# Altium PCB RGBM.PcbDoc (part 2 of 3)
Units mil, origin at the board's own origin, x right, y up, seen from the top; angles counter-clockwise.
Board outline 10650 x 5000 mil, 2 copper layers (Top Layer, Bottom Layer); 598 components, 309 nets, 1806 pads, 0 vias.
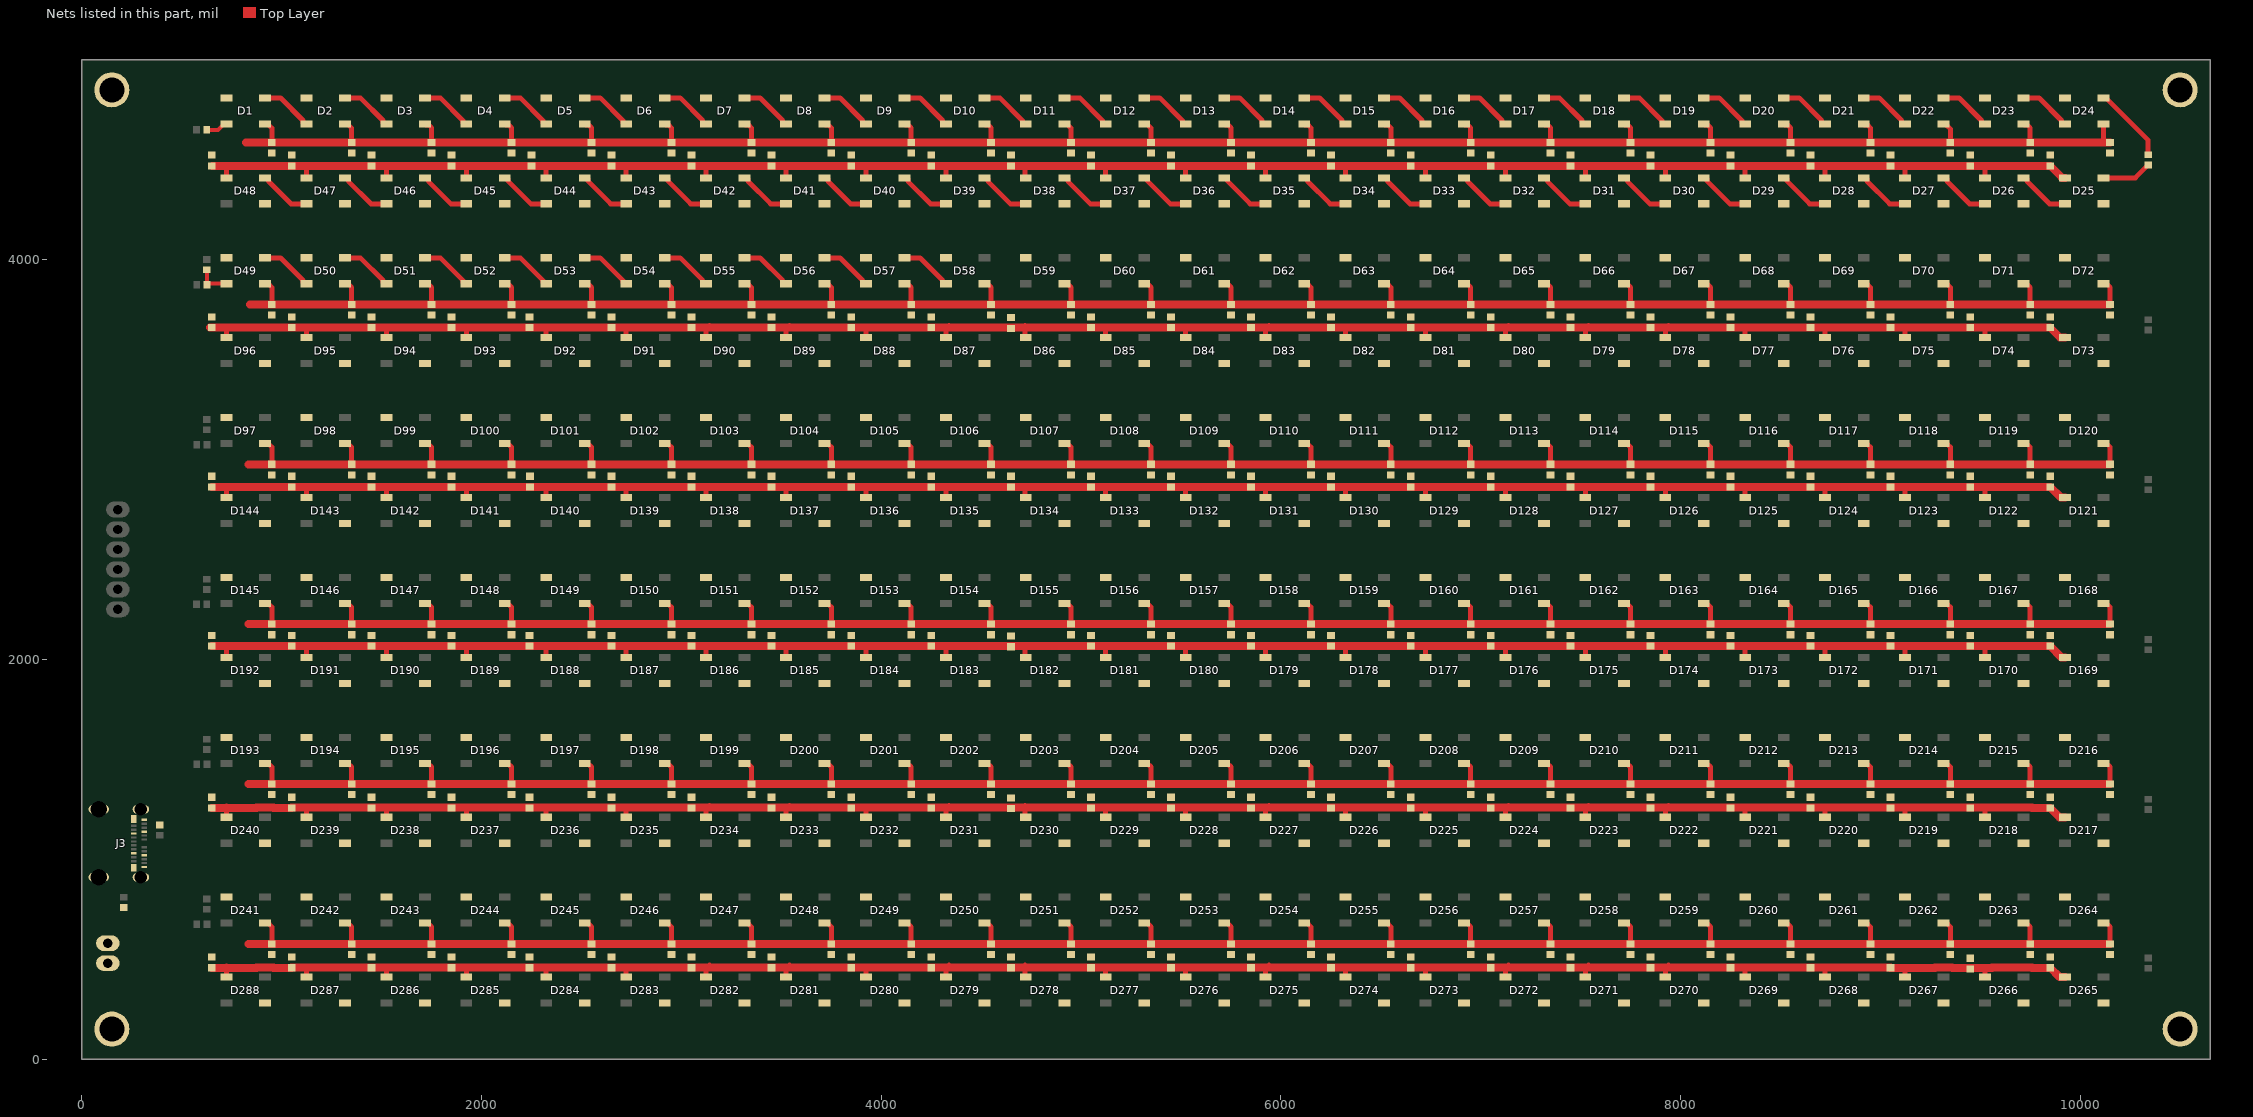
[diagram p2: the nets of this part, all layers, seen from the top]

## Nets (pads, with @x,y where several pads share a name; then routed paths per layer and width w, separated by ;. In a path a pad name is that pad's centre, name@x,y a point inside that pad or via, vN(x,y) a via of type N, cw(c..) or ccw(c..) an arc to the next point about the centre after c; other vN are vias at no path point)
+5V: C1.2 C2.2 C3.2 C4.2 C5.2 C6.2 C7.2 C8.2 C9.2 C10.2 C11.2 C12.2 C13.2 C14.2 C15.2 C16.2 C17.2 C18.2 C19.2 C20.2 C21.2 C22.2 C23.2 C24.2 C25.2 C26.2 C27.2 C28.2 C29.2 C30.2 C31.2 C32.2 C33.2 C34.2 C35.2 C36.2 C37.2 C38.2 C39.2 C40.2 C41.2 C42.2 C43.2 C44.2 C45.2 C46.2 C47.2 C48.2 C49.2 C50.2 C51.2 C52.2 C53.2 C54.2 C55.2 C56.2 C57.2 C58.2 C59.2 C60.2 C61.2 C62.2 C63.2 C64.2 C65.2 C66.2 C67.2 C68.2 C69.2 C70.2 C71.2 C72.2 C73.2 C74.2 C75.2 C76.2 C77.2 C78.2 C79.2 C80.2 C81.2 C82.2 C83.2 C84.2 C85.2 C86.2 C87.2 C88.2 C89.2 C90.2 C91.2 C92.2 C93.2 C94.2 C95.2 C96.2 C97.2 C98.2 C99.2 C100.2 C101.2 C102.2 C103.2 C104.2 C105.2 C106.2 C107.2 C108.2 C109.2 C110.2 C111.2 C112.2 C113.2 C114.2 C115.2 C116.2 C117.2 C118.2 C119.2 C120.2 C121.2 C122.2 C123.2 C124.2 C125.2 C126.2 C127.2 C128.2 C129.2 C130.2 C131.2 C132.2 C133.2 C134.2 C135.2 C136.2 C137.2 C138.2 C139.2 C140.2 C141.2 C142.2 C143.2 C144.2 C145.2 C146.2 C147.2 C148.2 C149.2 C150.2 C151.2 C152.2 C153.2 C154.2 C155.2 C156.2 C157.2 C158.2 C159.2 C160.2 C161.2 C162.2 C163.2 C164.2 C165.2 C166.2 C167.2 C168.2 C169.2 C170.2 C171.2 C172.2 C173.2 C174.2 C175.2 C176.2 C177.2 C178.2 C179.2 C180.2 C181.2 C182.2 C183.2 C184.2 C185.2 C186.2 C187.2 C188.2 C189.2 C190.2 C191.2 C192.2 C193.2 C194.2 C195.2 C196.2 C197.2 C198.2 C199.2 C200.2 C201.2 C202.2 C203.2 C204.2 C205.2 C206.2 C207.2 C208.2 C209.2 C210.2 C211.2 C212.2 C213.2 C214.2 C215.2 C216.2 C217.2 C218.2 C219.2 C220.2 C221.2 C222.2 C223.2 C224.2 C225.2 C226.2 C227.2 C228.2 C229.2 C230.2 C231.2 C232.2 C233.2 C234.2 C235.2 C236.2 C237.2 C238.2 C239.2 C240.2 C241.2 C242.2 C243.2 C244.2 C245.2 C246.2 C247.2 C248.2 C249.2 C250.2 C251.2 C252.2 C253.2 C254.2 C255.2 C256.2 C257.2 C258.2 C259.2 C260.2 C261.2 C262.2 C263.2 C264.2 C265.2 C266.2 C267.2 C268.2 C269.2 C270.2 C271.2 C272.2 C273.2 C274.2 C275.2 C276.2 C277.2 C278.2 C279.2 C280.2 C281.2 C282.2 C283.2 C284.2 C285.2 C286.2 C287.2 C288.2 D1.1-VDD D2.1-VDD D3.1-VDD D4.1-VDD D5.1-VDD D6.1-VDD D7.1-VDD D8.1-VDD D9.1-VDD D10.1-VDD D11.1-VDD D12.1-VDD D13.1-VDD D14.1-VDD D15.1-VDD D16.1-VDD D17.1-VDD D18.1-VDD D19.1-VDD D20.1-VDD D21.1-VDD D22.1-VDD D23.1-VDD D24.1-VDD D25.1-VDD D26.1-VDD D27.1-VDD D28.1-VDD D29.1-VDD D30.1-VDD D31.1-VDD D32.1-VDD D33.1-VDD D34.1-VDD D35.1-VDD D36.1-VDD D37.1-VDD D38.1-VDD D39.1-VDD D40.1-VDD D41.1-VDD D42.1-VDD D43.1-VDD D44.1-VDD D45.1-VDD D46.1-VDD D47.1-VDD D48.1-VDD D49.1-VDD D50.1-VDD D51.1-VDD D52.1-VDD D53.1-VDD D54.1-VDD D55.1-VDD D56.1-VDD D57.1-VDD D58.1-VDD D59.1-VDD D60.1-VDD D61.1-VDD D62.1-VDD D63.1-VDD D64.1-VDD D65.1-VDD D66.1-VDD D67.1-VDD D68.1-VDD D69.1-VDD D70.1-VDD D71.1-VDD D72.1-VDD D73.1-VDD D74.1-VDD D75.1-VDD D76.1-VDD D77.1-VDD D78.1-VDD D79.1-VDD D80.1-VDD D81.1-VDD D82.1-VDD D83.1-VDD D84.1-VDD D85.1-VDD D86.1-VDD D87.1-VDD D88.1-VDD D89.1-VDD D90.1-VDD D91.1-VDD D92.1-VDD D93.1-VDD D94.1-VDD D95.1-VDD D96.1-VDD D97.1-VDD D98.1-VDD D99.1-VDD D100.1-VDD D101.1-VDD D102.1-VDD D103.1-VDD D104.1-VDD D105.1-VDD D106.1-VDD D107.1-VDD D108.1-VDD D109.1-VDD D110.1-VDD D111.1-VDD D112.1-VDD D113.1-VDD D114.1-VDD D115.1-VDD D116.1-VDD D117.1-VDD D118.1-VDD D119.1-VDD D120.1-VDD D121.1-VDD D122.1-VDD D123.1-VDD D124.1-VDD D125.1-VDD D126.1-VDD D127.1-VDD D128.1-VDD D129.1-VDD D130.1-VDD D131.1-VDD D132.1-VDD D133.1-VDD D134.1-VDD D135.1-VDD D136.1-VDD D137.1-VDD D138.1-VDD D139.1-VDD D140.1-VDD D141.1-VDD D142.1-VDD D143.1-VDD D144.1-VDD D145.1-VDD D146.1-VDD D147.1-VDD D148.1-VDD D149.1-VDD D150.1-VDD D151.1-VDD D152.1-VDD D153.1-VDD D154.1-VDD D155.1-VDD D156.1-VDD D157.1-VDD D158.1-VDD D159.1-VDD D160.1-VDD D161.1-VDD D162.1-VDD D163.1-VDD D164.1-VDD D165.1-VDD D166.1-VDD D167.1-VDD D168.1-VDD D169.1-VDD D170.1-VDD D171.1-VDD D172.1-VDD D173.1-VDD D174.1-VDD D175.1-VDD D176.1-VDD D177.1-VDD D178.1-VDD D179.1-VDD D180.1-VDD D181.1-VDD D182.1-VDD D183.1-VDD D184.1-VDD D185.1-VDD D186.1-VDD D187.1-VDD D188.1-VDD D189.1-VDD D190.1-VDD D191.1-VDD D192.1-VDD D193.1-VDD D194.1-VDD D195.1-VDD D196.1-VDD D197.1-VDD D198.1-VDD D199.1-VDD D200.1-VDD D201.1-VDD D202.1-VDD D203.1-VDD D204.1-VDD D205.1-VDD D206.1-VDD D207.1-VDD D208.1-VDD D209.1-VDD D210.1-VDD D211.1-VDD D212.1-VDD D213.1-VDD D214.1-VDD D215.1-VDD D216.1-VDD D217.1-VDD D218.1-VDD D219.1-VDD D220.1-VDD D221.1-VDD D222.1-VDD D223.1-VDD D224.1-VDD D225.1-VDD D226.1-VDD D227.1-VDD D228.1-VDD D229.1-VDD D230.1-VDD D231.1-VDD D232.1-VDD D233.1-VDD D234.1-VDD D235.1-VDD D236.1-VDD D237.1-VDD D238.1-VDD D239.1-VDD D240.1-VDD D241.1-VDD D242.1-VDD D243.1-VDD D244.1-VDD D245.1-VDD D246.1-VDD D247.1-VDD D248.1-VDD D249.1-VDD D250.1-VDD D251.1-VDD D252.1-VDD D253.1-VDD D254.1-VDD D255.1-VDD D256.1-VDD D257.1-VDD D258.1-VDD D259.1-VDD D260.1-VDD D261.1-VDD D262.1-VDD D263.1-VDD D264.1-VDD D265.1-VDD D266.1-VDD D267.1-VDD D268.1-VDD D269.1-VDD D270.1-VDD D271.1-VDD D272.1-VDD D273.1-VDD D274.1-VDD D275.1-VDD D276.1-VDD D277.1-VDD D278.1-VDD D279.1-VDD D280.1-VDD D281.1-VDD D282.1-VDD D283.1-VDD D284.1-VDD D285.1-VDD D286.1-VDD D287.1-VDD D288.1-VDD J2.1 J3.A4 J3.A9 J3.B4 J3.B9 | length 136269.4
  Top Layer w25: 720,4470 723.54,4466.46 D48.1-VDD@723.54,4409.96 ; D288.1-VDD@723.54,409.96 723.54,456.85 723.54,466.46 ; D240.1-VDD@723.54,1209.96 723.54,1256.85 723.54,1266.46 ; D192.1-VDD@723.54,2009.96 723.54,2066.46 ; D144.1-VDD@723.54,2809.96 723.54,2863.43 723.54,2866.46 ; D96.1-VDD@723.54,3609.96 723.54,3660 723.54,3666.46 ; D241.1-VDD@916.46,683.46 928.27,683.46 950,661.73 C241.2@950,590 ; D193.1-VDD@916.46,1483.46 928.27,1483.46 950,1461.73 C193.2@950,1390 ; D145.1-VDD@916.46,2283.46 928.27,2283.46 950,2261.73 C145.2@950,2190 ; D97.1-VDD@916.46,3083.46 928.27,3083.46 950,3061.73 C97.2@950,2990 ; D49.1-VDD@916.46,3883.46 928.27,3883.46 950,3861.73 C49.2@950,3790 ; D1.1-VDD@916.46,4680.04 928.27,4680.04 950,4658.31 C1.2@950,4586.57 ; D287.1-VDD@1123.54,409.96 1123.54,457.68 1123.54,463.54 ; D239.1-VDD@1123.54,1209.96 1123.54,1257.68 1123.54,1263.54 ; D191.1-VDD@1123.54,2009.96 1123.54,2063.54 ; D143.1-VDD@1123.54,2809.96 1123.54,2863.43 1123.54,2863.54 ; D95.1-VDD@1123.54,3609.96 1123.54,3660 1123.54,3663.54 ; D47.1-VDD@1123.54,4409.96 1123.54,4463.54 1130,4470 ; D242.1-VDD@1316.46,683.46 1328.27,683.46 1350,661.73 C242.2@1350,590 ; D194.1-VDD@1316.46,1483.46 1328.27,1483.46 1350,1461.73 C194.2@1350,1390 ; D146.1-VDD@1316.46,2283.46 1328.27,2283.46 1350,2261.73 C146.2@1350,2190 ; D98.1-VDD@1316.46,3083.46 1328.27,3083.46 1350,3061.73 C98.2@1350,2990 ; D50.1-VDD@1316.46,3883.46 1328.27,3883.46 1350,3861.73 C50.2@1350,3790 ; D2.1-VDD@1316.46,4680.04 1328.27,4680.04 1333.48,4674.82 1350,4658.31 C2.2@1350,4586.57 ; 1320,4580 1320,4586.57 ; 1520,4470 1523.54,4466.46 D46.1-VDD@1523.54,4409.96 ; D286.1-VDD@1523.54,409.96 1523.54,457.68 1523.54,466.46 ; D238.1-VDD@1523.54,1209.96 1523.54,1257.68 1523.54,1266.46 ; D190.1-VDD@1523.54,2009.96 1523.54,2066.46 ; D142.1-VDD@1523.54,2809.96 1523.54,2863.43 1523.54,2866.46 ; D94.1-VDD@1523.54,3609.96 1523.54,3660 1523.54,3666.46 ; D243.1-VDD@1716.46,683.46 1728.27,683.46 1750,661.73 C243.2@1750,590 ; D195.1-VDD@1716.46,1483.46 1728.27,1483.46 1750,1461.73 C195.2@1750,1390 ; D147.1-VDD@1716.46,2283.46 1728.27,2283.46 1750,2261.73 C147.2@1750,2190 ; D99.1-VDD@1716.46,3083.46 1728.27,3083.46 1750,3061.73 C99.2@1750,2990 ; D51.1-VDD@1716.46,3883.46 1728.27,3883.46 1750,3861.73 C51.2@1750,3790 ; D3.1-VDD@1716.46,4680.04 1721.67,4674.82 1735.36,4674.82 1750,4660.18 C3.2@1750,4586.57 ; D285.1-VDD@1923.54,409.96 1923.54,457.68 1923.54,463.54 ; D237.1-VDD@1923.54,1209.96 1923.54,1257.68 1923.54,1263.54 ; D189.1-VDD@1923.54,2009.96 1923.54,2063.54 ; D141.1-VDD@1923.54,2809.96 1923.54,2863.43 1923.54,2863.54 ; D93.1-VDD@1923.54,3609.96 1923.54,3660 1923.54,3663.54 ; D45.1-VDD@1923.54,4409.96 1923.54,4463.54 1930,4470 ; D244.1-VDD@2116.46,683.46 2128.27,683.46 2150,661.73 C244.2@2150,590 ; D196.1-VDD@2116.46,1483.46 2128.27,1483.46 2150,1461.73 C196.2@2150,1390 ; D148.1-VDD@2116.46,2283.46 2128.27,2283.46 2150,2261.73 C148.2@2150,2190 ; D100.1-VDD@2116.46,3083.46 2128.27,3083.46 2150,3061.73 C100.2@2150,2990 ; D52.1-VDD@2116.46,3883.46 2128.27,3883.46 2150,3861.73 C52.2@2150,3790 ; D4.1-VDD@2116.46,4680.04 2121.67,4674.82 2135.36,4674.82 2150,4660.18 C4.2@2150,4586.57 ; D284.1-VDD@2323.54,409.96 2323.54,457.68 2323.54,463.54 ; D236.1-VDD@2323.54,1209.96 2323.54,1257.68 2323.54,1263.54 ; D188.1-VDD@2323.54,2009.96 2323.54,2063.54 ; D140.1-VDD@2323.54,2809.96 2323.54,2863.43 2323.54,2863.54 ; D92.1-VDD@2323.54,3609.96 2323.54,3660 2323.54,3663.54 ; D44.1-VDD@2323.54,4409.96 2323.54,4463.54 2330,4470 ; D245.1-VDD@2516.46,683.46 2528.27,683.46 2550,661.73 C245.2@2550,590 ; D197.1-VDD@2516.46,1483.46 2528.27,1483.46 2550,1461.73 C197.2@2550,1390 ; D149.1-VDD@2516.46,2283.46 2528.27,2283.46 2550,2261.73 C149.2@2550,2190 ; D101.1-VDD@2516.46,3083.46 2528.27,3083.46 2550,3061.73 C101.2@2550,2990 ; D53.1-VDD@2516.46,3883.46 2528.27,3883.46 2550,3861.73 C53.2@2550,3790 ; D5.1-VDD@2516.46,4680.04 2521.67,4674.82 2535.36,4674.82 2550,4660.18 C5.2@2550,4586.57 ; D283.1-VDD@2723.54,409.96 2723.54,457.68 2723.54,463.54 ; D235.1-VDD@2723.54,1209.96 2723.54,1257.68 2723.54,1263.54 ; D187.1-VDD@2723.54,2009.96 2723.54,2063.54 ; D139.1-VDD@2723.54,2809.96 2723.54,2863.43 2723.54,2863.54 ; D91.1-VDD@2723.54,3609.96 2723.54,3660 2723.54,3663.54 ; D43.1-VDD@2723.54,4409.96 2723.54,4463.54 2730,4470 ; D246.1-VDD@2916.46,683.46 2928.27,683.46 2950,661.73 C246.2@2950,590 ; D198.1-VDD@2916.46,1483.46 2928.27,1483.46 2950,1461.73 C198.2@2950,1390 ; D150.1-VDD@2916.46,2283.46 2928.27,2283.46 2950,2261.73 C150.2@2950,2190 ; D102.1-VDD@2916.46,3083.46 2928.27,3083.46 2950,3061.73 C102.2@2950,2990 ; D54.1-VDD@2916.46,3883.46 2928.27,3883.46 2950,3861.73 C54.2@2950,3790 ; D6.1-VDD@2916.46,4680.04 2921.67,4674.82 2935.36,4674.82 2950,4660.18 C6.2@2950,4586.57 ; D282.1-VDD@3123.54,409.96 3123.54,453.54 3127.68,457.68 3140,470 ; D234.1-VDD@3123.54,1209.96 3123.54,1253.54 3127.68,1257.68 3140,1270 ; D186.1-VDD@3123.54,2009.96 3123.54,2053.54 3136.85,2066.85 3140,2070 ; D138.1-VDD@3123.54,2809.96 3123.54,2853.54 3133.43,2863.43 3140,2870 ; D90.1-VDD@3123.54,3609.96 3123.54,3653.54 3130,3660 3140,3670 ; D42.1-VDD@3123.54,4409.96 3123.54,4453.54 3140,4470 ; D247.1-VDD@3316.46,683.46 3328.27,683.46 3350,661.73 C247.2@3350,590 ; D199.1-VDD@3316.46,1483.46 3328.27,1483.46 3350,1461.73 C199.2@3350,1390 ; D151.1-VDD@3316.46,2283.46 3328.27,2283.46 3350,2261.73 C151.2@3350,2190 ; D103.1-VDD@3316.46,3083.46 3328.27,3083.46 3350,3061.73 C103.2@3350,2990 ; D55.1-VDD@3316.46,3883.46 3328.27,3883.46 3350,3861.73 C55.2@3350,3790 ; D7.1-VDD@3316.46,4680.04 3321.67,4674.82 3335.36,4674.82 3350,4660.18 C7.2@3350,4586.57 ; D281.1-VDD@3523.54,409.96 3523.54,453.54 3527.68,457.68 3540,470 ; D233.1-VDD@3523.54,1209.96 3523.54,1253.54 3527.68,1257.68 3540,1270 ; D185.1-VDD@3523.54,2009.96 3523.54,2053.54 3536.85,2066.85 3540,2070 ; D137.1-VDD@3523.54,2809.96 3523.54,2853.54 3533.43,2863.43 3540,2870 ; D89.1-VDD@3523.54,3609.96 3523.54,3653.54 3530,3660 3540,3670 ; D41.1-VDD@3523.54,4409.96 3523.54,4453.54 3540,4470 ; D248.1-VDD@3716.46,683.46 3728.27,683.46 3750,661.73 C248.2@3750,590 ; D200.1-VDD@3716.46,1483.46 3728.27,1483.46 3750,1461.73 C200.2@3750,1390 ; D152.1-VDD@3716.46,2283.46 3728.27,2283.46 3750,2261.73 C152.2@3750,2190 ; D104.1-VDD@3716.46,3083.46 3728.27,3083.46 3750,3061.73 C104.2@3750,2990 ; D56.1-VDD@3716.46,3883.46 3728.27,3883.46 3750,3861.73 C56.2@3750,3790 ; D8.1-VDD@3716.46,4680.04 3721.67,4674.82 3735.36,4674.82 3750,4660.18 C8.2@3750,4586.57 ; D280.1-VDD@3923.54,409.96 3923.54,457.68 3923.54,463.54 ; D232.1-VDD@3923.54,1209.96 3923.54,1257.68 3923.54,1263.54 ; D184.1-VDD@3923.54,2009.96 3923.54,2063.54 ; D136.1-VDD@3923.54,2809.96 3923.54,2863.43 3923.54,2863.54 ; D88.1-VDD@3923.54,3609.96 3923.54,3660 3923.54,3663.54 ; D40.1-VDD@3923.54,4409.96 3923.54,4463.54 3930,4470 ; D249.1-VDD@4116.46,683.46 4128.27,683.46 4150,661.73 C249.2@4150,590 ; D201.1-VDD@4116.46,1483.46 4128.27,1483.46 4150,1461.73 C201.2@4150,1390 ; D153.1-VDD@4116.46,2283.46 4128.27,2283.46 4150,2261.73 C153.2@4150,2190 ; D105.1-VDD@4116.46,3083.46 4128.27,3083.46 4150,3061.73 C105.2@4150,2990 ; D57.1-VDD@4116.46,3883.46 4128.27,3883.46 4150,3861.73 C57.2@4150,3790 ; D9.1-VDD@4116.46,4680.04 4121.67,4674.82 4135.36,4674.82 4150,4660.18 C9.2@4150,4586.57 ; D279.1-VDD@4323.54,409.96 4323.54,453.54 4327.68,457.68 4340,470 ; D231.1-VDD@4323.54,1209.96 4323.54,1253.54 4327.68,1257.68 4340,1270 ; D183.1-VDD@4323.54,2009.96 4323.54,2053.54 4336.85,2066.85 4340,2070 ; D135.1-VDD@4323.54,2809.96 4323.54,2853.54 4333.43,2863.43 4340,2870 ; D87.1-VDD@4323.54,3609.96 4323.54,3653.54 4330,3660 4340,3670 ; D39.1-VDD@4323.54,4409.96 4323.54,4453.54 4340,4470 ; D250.1-VDD@4516.46,683.46 4528.27,683.46 4550,661.73 C250.2@4550,590 ; D202.1-VDD@4516.46,1483.46 4528.27,1483.46 4550,1461.73 C202.2@4550,1390 ; D154.1-VDD@4516.46,2283.46 4528.27,2283.46 4550,2261.73 C154.2@4550,2190 ; D106.1-VDD@4516.46,3083.46 4528.27,3083.46 4550,3061.73 C106.2@4550,2990 ; D58.1-VDD@4516.46,3883.46 4528.27,3883.46 4550,3861.73 C58.2@4550,3790 ; D10.1-VDD@4516.46,4680.04 4521.67,4674.82 4535.36,4674.82 4550,4660.18 C10.2@4550,4586.57 ; D278.1-VDD@4720,413.5 4720,457.68 4720,470 ; D230.1-VDD@4720,1213.5 4720,1257.68 4720,1270 ; D182.1-VDD@4720,2013.5 4720,2066.85 4720,2070 ; D134.1-VDD@4720,2813.5 4720,2863.43 4720,2870 ; D86.1-VDD@4720,3613.5 4720,3660 4720,3670 ; 4720,4470 4720,4413.5 D38.1-VDD@4723.54,4409.96 ; D251.1-VDD@4916.46,683.46 4928.27,683.46 4950,661.73 C251.2@4950,590 ; D203.1-VDD@4916.46,1483.46 4928.27,1483.46 4950,1461.73 C203.2@4950,1390 ; D155.1-VDD@4916.46,2283.46 4928.27,2283.46 4950,2261.73 C155.2@4950,2190 ; D107.1-VDD@4916.46,3083.46 4928.27,3083.46 4950,3061.73 C107.2@4950,2990 ; D59.1-VDD@4916.46,3883.46 4928.27,3883.46 4950,3861.73 C59.2@4950,3790 ; D11.1-VDD@4916.46,4680.04 4928.27,4680.04 4950,4658.31 C11.2@4950,4586.57 ; D277.1-VDD@5123.54,409.96 5123.54,457.68 5123.54,463.54 ; D229.1-VDD@5123.54,1209.96 5123.54,1257.68 5123.54,1263.54 ; D181.1-VDD@5123.54,2009.96 5123.54,2063.54 ; D133.1-VDD@5123.54,2809.96 5123.54,2863.43 5123.54,2863.54 ; D85.1-VDD@5123.54,3609.96 5123.54,3660 5123.54,3663.54 ; D37.1-VDD@5123.54,4409.96 5123.54,4463.54 5130,4470 ; D252.1-VDD@5316.46,683.46 5328.27,683.46 5350,661.73 C252.2@5350,590 ; D204.1-VDD@5316.46,1483.46 5328.27,1483.46 5350,1461.73 C204.2@5350,1390 ; D156.1-VDD@5316.46,2283.46 5328.27,2283.46 5350,2261.73 C156.2@5350,2190 ; D108.1-VDD@5316.46,3083.46 5328.27,3083.46 5350,3061.73 C108.2@5350,2990 ; D60.1-VDD@5316.46,3883.46 5328.27,3883.46 5350,3861.73 C60.2@5350,3790 ; D12.1-VDD@5316.46,4680.04 5328.27,4680.04 5350,4658.31 C12.2@5350,4586.57 ; D276.1-VDD@5523.54,409.96 5523.54,457.68 5523.54,463.54 ; D228.1-VDD@5523.54,1209.96 5523.54,1257.68 5523.54,1263.54 ; D180.1-VDD@5523.54,2009.96 5523.54,2063.54 ; D132.1-VDD@5523.54,2809.96 5523.54,2863.43 5523.54,2863.54 ; D84.1-VDD@5523.54,3609.96 5523.54,3660 5523.54,3663.54 ; D36.1-VDD@5523.54,4409.96 5523.54,4463.54 5530,4470 ; D253.1-VDD@5716.46,683.46 5728.27,683.46 5750,661.73 C253.2@5750,590 ; D205.1-VDD@5716.46,1483.46 5728.27,1483.46 5750,1461.73 C205.2@5750,1390 ; D157.1-VDD@5716.46,2283.46 5728.27,2283.46 5750,2261.73 C157.2@5750,2190 ; D109.1-VDD@5716.46,3083.46 5728.27,3083.46 5750,3061.73 C109.2@5750,2990 ; D61.1-VDD@5716.46,3883.46 5728.27,3883.46 5750,3861.73 C61.2@5750,3790 ; D13.1-VDD@5716.46,4680.04 5721.67,4674.82 5735.36,4674.82 5750,4660.18 C13.2@5750,4586.57 ; D275.1-VDD@5923.54,409.96 5923.54,453.54 5927.68,457.68 5940,470 ; D227.1-VDD@5923.54,1209.96 5923.54,1253.54 5927.68,1257.68 5940,1270 ; D179.1-VDD@5923.54,2009.96 5923.54,2053.54 5936.85,2066.85 5940,2070 ; D131.1-VDD@5923.54,2809.96 5923.54,2853.54 5933.43,2863.43 5940,2870 ; D83.1-VDD@5923.54,3609.96 5923.54,3653.54 5930,3660 5940,3670 ; D35.1-VDD@5923.54,4409.96 5923.54,4453.54 5940,4470 ; D254.1-VDD@6116.46,683.46 6128.27,683.46 6150,661.73 C254.2@6150,590 ; D206.1-VDD@6116.46,1483.46 6128.27,1483.46 6150,1461.73 C206.2@6150,1390 ; D158.1-VDD@6116.46,2283.46 6128.27,2283.46 6150,2261.73 C158.2@6150,2190 ; D110.1-VDD@6116.46,3083.46 6128.27,3083.46 6150,3061.73 C110.2@6150,2990 ; D62.1-VDD@6116.46,3883.46 6128.27,3883.46 6150,3861.73 C62.2@6150,3790 ; D14.1-VDD@6116.46,4680.04 6121.67,4674.82 6135.36,4674.82 6150,4660.18 C14.2@6150,4586.57 ; D274.1-VDD@6323.54,409.96 6323.54,457.68 6323.54,463.54 ; D226.1-VDD@6323.54,1209.96 6323.54,1257.68 6323.54,1263.54 ; D178.1-VDD@6323.54,2009.96 6323.54,2063.54 ; D130.1-VDD@6323.54,2809.96 6323.54,2863.43 6323.54,2863.54 ; D82.1-VDD@6323.54,3609.96 6323.54,3660 6323.54,3663.54 ; D34.1-VDD@6323.54,4409.96 6323.54,4463.54 6330,4470 ; D255.1-VDD@6516.46,683.46 6528.27,683.46 6550,661.73 C255.2@6550,590 ; D207.1-VDD@6516.46,1483.46 6528.27,1483.46 6550,1461.73 C207.2@6550,1390 ; D159.1-VDD@6516.46,2283.46 6528.27,2283.46 6550,2261.73 C159.2@6550,2190 ; D111.1-VDD@6516.46,3083.46 6528.27,3083.46 6550,3061.73 C111.2@6550,2990 ; D63.1-VDD@6516.46,3883.46 6528.27,3883.46 6550,3861.73 C63.2@6550,3790 ; D15.1-VDD@6516.46,4680.04 6521.67,4674.82 6535.36,4674.82 6550,4660.18 C15.2@6550,4586.57 ; D273.1-VDD@6723.54,409.96 6723.54,457.68 6723.54,463.54 ; D225.1-VDD@6723.54,1209.96 6723.54,1257.68 6723.54,1263.54 ; D177.1-VDD@6723.54,2009.96 6723.54,2063.54 ; D129.1-VDD@6723.54,2809.96 6723.54,2863.43 6723.54,2863.54 ; D81.1-VDD@6723.54,3609.96 6723.54,3660 6723.54,3663.54 ; D33.1-VDD@6723.54,4409.96 6723.54,4463.54 6730,4470 ; D256.1-VDD@6916.46,683.46 6928.27,683.46 6950,661.73 C256.2@6950,590 ; D208.1-VDD@6916.46,1483.46 6928.27,1483.46 6950,1461.73 C208.2@6950,1390 ; D160.1-VDD@6916.46,2283.46 6928.27,2283.46 6950,2261.73 C160.2@6950,2190 ; D112.1-VDD@6916.46,3083.46 6928.27,3083.46 6950,3061.73 C112.2@6950,2990 ; D64.1-VDD@6916.46,3883.46 6928.27,3883.46 6950,3861.73 C64.2@6950,3790 ; D16.1-VDD@6916.46,4680.04 6921.67,4674.82 6935.36,4674.82 6950,4660.18 C16.2@6950,4586.57 ; 6920,4586.5 6920,4586.57 ; D272.1-VDD@7123.54,409.96 7123.54,453.54 7127.68,457.68 7140,470 ; D224.1-VDD@7123.54,1209.96 7123.54,1253.54 7127.68,1257.68 7140,1270 ; D176.1-VDD@7123.54,2009.96 7123.54,2053.54 7136.85,2066.85 7140,2070 ; D128.1-VDD@7123.54,2809.96 7123.54,2853.54 7133.43,2863.43 7140,2870 ; D80.1-VDD@7123.54,3609.96 7123.54,3653.54 7130,3660 7140,3670 ; D32.1-VDD@7123.54,4409.96 7123.54,4453.54 7140,4470 ; D257.1-VDD@7316.46,683.46 7328.27,683.46 7350,661.73 C257.2@7350,590 ; D209.1-VDD@7316.46,1483.46 7328.27,1483.46 7350,1461.73 C209.2@7350,1390 ; D161.1-VDD@7316.46,2283.46 7328.27,2283.46 7350,2261.73 C161.2@7350,2190 ; D113.1-VDD@7316.46,3083.46 7328.27,3083.46 7350,3061.73 C113.2@7350,2990 ; D65.1-VDD@7316.46,3883.46 7328.27,3883.46 7350,3861.73 C65.2@7350,3790 ; D17.1-VDD@7316.46,4680.04 7321.67,4674.82 7335.36,4674.82 7350,4660.18 C17.2@7350,4586.57 ; 7320,4586.5 7320,4586.57 ; D271.1-VDD@7523.54,409.96 7523.54,453.54 7527.68,457.68 7540,470 ; D223.1-VDD@7523.54,1209.96 7523.54,1253.54 7527.68,1257.68 7540,1270 ; D175.1-VDD@7523.54,2009.96 7523.54,2053.54 7536.85,2066.85 7540,2070 ; D127.1-VDD@7523.54,2809.96 7523.54,2853.54 7533.43,2863.43 7540,2870 ; D79.1-VDD@7523.54,3609.96 7523.54,3653.54 7530,3660 7540,3670 ; D31.1-VDD@7523.54,4409.96 7523.54,4453.54 7540,4470 ; D258.1-VDD@7716.46,683.46 7728.27,683.46 7750,661.73 C258.2@7750,590 ; D210.1-VDD@7716.46,1483.46 7728.27,1483.46 7750,1461.73 C210.2@7750,1390 ; D162.1-VDD@7716.46,2283.46 7728.27,2283.46 7750,2261.73 C162.2@7750,2190 ; D114.1-VDD@7716.46,3083.46 7728.27,3083.46 7750,3061.73 C114.2@7750,2990 ; D66.1-VDD@7716.46,3883.46 7728.27,3883.46 7750,3861.73 C66.2@7750,3790 ; D18.1-VDD@7716.46,4680.04 7721.67,4674.82 7735.36,4674.82 7750,4660.18 C18.2@7750,4586.57 ; 7720,4586.5 7720,4586.57 ; D270.1-VDD@7923.54,409.96 7923.54,453.54 7927.68,457.68 7940,470 ; D222.1-VDD@7923.54,1209.96 7923.54,1253.54 7927.68,1257.68 7940,1270 ; D174.1-VDD@7923.54,2009.96 7923.54,2053.54 7936.85,2066.85 7940,2070 ; D126.1-VDD@7923.54,2809.96 7923.54,2853.54 7933.43,2863.43 7940,2870 ; D78.1-VDD@7923.54,3609.96 7923.54,3653.54 7930,3660 7940,3670 ; D30.1-VDD@7923.54,4409.96 7923.54,4453.54 7940,4470 ; D259.1-VDD@8116.46,683.46 8128.27,683.46 8150,661.73 C259.2@8150,590 ; D211.1-VDD@8116.46,1483.46 8128.27,1483.46 8150,1461.73 C211.2@8150,1390 ; D163.1-VDD@8116.46,2283.46 8128.27,2283.46 8150,2261.73 C163.2@8150,2190 ; D115.1-VDD@8116.46,3083.46 8128.27,3083.46 8150,3061.73 C115.2@8150,2990 ; D67.1-VDD@8116.46,3883.46 8128.27,3883.46 8150,3861.73 C67.2@8150,3790 ; D19.1-VDD@8116.46,4680.04 8121.67,4674.82 8135.36,4674.82 8150,4660.18 C19.2@8150,4586.57 ; 8120,4586.5 8120,4586.57 ; D269.1-VDD@8323.54,409.96 8323.54,457.68 8323.54,463.54 ; D221.1-VDD@8323.54,1209.96 8323.54,1257.68 8323.54,1263.54 ; D173.1-VDD@8323.54,2009.96 8323.54,2063.54 ; D125.1-VDD@8323.54,2809.96 8323.54,2863.43 8323.54,2863.54 ; D77.1-VDD@8323.54,3609.96 8323.54,3660 8323.54,3663.54 ; D29.1-VDD@8323.54,4409.96 8323.54,4463.54 8330,4470 ; D260.1-VDD@8516.46,683.46 8528.27,683.46 8550,661.73 C260.2@8550,590 ; D212.1-VDD@8516.46,1483.46 8528.27,1483.46 8550,1461.73 C212.2@8550,1390 ; D164.1-VDD@8516.46,2283.46 8528.27,2283.46 8550,2261.73 C164.2@8550,2190 ; D116.1-VDD@8516.46,3083.46 8528.27,3083.46 8550,3061.73 C116.2@8550,2990 ; D68.1-VDD@8516.46,3883.46 8528.27,3883.46 8550,3861.73 C68.2@8550,3790 ; D20.1-VDD@8516.46,4680.04 8521.67,4674.82 8535.36,4674.82 8550,4660.18 C20.2@8550,4586.57 ; 8520,4586.5 8520,4586.57 ; D268.1-VDD@8723.54,409.96 8723.54,457.68 8723.54,463.54 ; D220.1-VDD@8723.54,1209.96 8723.54,1257.68 8723.54,1263.54 ; D172.1-VDD@8723.54,2009.96 8723.54,2063.54 ; D124.1-VDD@8723.54,2809.96 8723.54,2863.43 8723.54,2863.54 ; D76.1-VDD@8723.54,3609.96 8723.54,3660 8723.54,3663.54 ; D28.1-VDD@8723.54,4409.96 8723.54,4463.54 8730,4470 ; D261.1-VDD@8916.46,683.46 8928.27,683.46 8950,661.73 C261.2@8950,590 ; D213.1-VDD@8916.46,1483.46 8928.27,1483.46 8950,1461.73 C213.2@8950,1390 ; D165.1-VDD@8916.46,2283.46 8928.27,2283.46 8950,2261.73 C165.2@8950,2190 ; D117.1-VDD@8916.46,3083.46 8928.27,3083.46 8950,3061.73 C117.2@8950,2990 ; D69.1-VDD@8916.46,3883.46 8928.27,3883.46 8950,3861.73 C69.2@8950,3790 ; D21.1-VDD@8916.46,4680.04 8921.67,4674.82 8935.36,4674.82 8950,4660.18 C21.2@8950,4586.57 ; 8920,4586.5 8920,4586.57 ; 9120,4470 9123.54,4466.46 D27.1-VDD@9123.54,4409.96 ; D267.1-VDD@9123.54,409.96 9123.54,456.85 ; D219.1-VDD@9123.54,1209.96 9123.54,1257.68 9123.54,1266.46 ; D171.1-VDD@9123.54,2009.96 9123.54,2066.46 ; D123.1-VDD@9123.54,2809.96 9123.54,2863.43 9123.54,2866.46 ; D75.1-VDD@9123.54,3609.96 9123.54,3660 9123.54,3666.46 ; D262.1-VDD@9316.46,683.46 9328.27,683.46 9350,661.73 C262.2@9350,590 ; D214.1-VDD@9316.46,1483.46 9328.27,1483.46 9350,1461.73 C214.2@9350,1390 ; D166.1-VDD@9316.46,2283.46 9328.27,2283.46 9350,2261.73 C166.2@9350,2190 ; D118.1-VDD@9316.46,3083.46 9328.27,3083.46 9350,3061.73 C118.2@9350,2990 ; D70.1-VDD@9316.46,3883.46 9328.27,3883.46 9350,3861.73 C70.2@9350,3790 ; D22.1-VDD@9316.46,4680.04 9328.27,4680.04 9333.48,4674.82 9333.48,4671.34 9350,4654.82 C22.2@9350,4586.57 ; D266.1-VDD@9523.54,409.96 9523.54,456.88 9523.54,463.54 ; D218.1-VDD@9523.54,1209.96 9523.54,1257.68 9523.54,1263.54 ; D170.1-VDD@9523.54,2009.96 9523.54,2063.54 ; D122.1-VDD@9523.54,2809.96 9523.54,2863.43 9523.54,2863.54 ; D74.1-VDD@9523.54,3609.96 9523.54,3660 9523.54,3663.54 ; D26.1-VDD@9523.54,4409.96 9523.54,4463.54 9530,4470 ; D263.1-VDD@9716.46,683.46 9728.27,683.46 9750,661.73 C263.2@9750,590 ; D215.1-VDD@9716.46,1483.46 9728.27,1483.46 9750,1461.73 C215.2@9750,1390 ; D167.1-VDD@9716.46,2283.46 9728.27,2283.46 9750,2261.73 C167.2@9750,2190 ; D119.1-VDD@9716.46,3083.46 9728.27,3083.46 9750,3061.73 C119.2@9750,2990 ; D71.1-VDD@9716.46,3883.46 9728.27,3883.46 9750,3861.73 C71.2@9750,3790 ; D23.1-VDD@9716.46,4680.04 9721.67,4674.82 9735.36,4674.82 9750,4660.18 C23.2@9750,4586.57 ; D264.1-VDD@10116.46,683.46 10128.27,683.46 10150,661.73 C264.2@10150,590 ; D216.1-VDD@10116.46,1483.46 10128.27,1483.46 10150,1461.73 C216.2@10150,1390 ; D168.1-VDD@10116.46,2283.46 10128.27,2283.46 10150,2261.73 C168.2@10150,2190 ; D120.1-VDD@10116.46,3083.46 10128.27,3083.46 10150,3061.73 C120.2@10150,2990 ; D72.1-VDD@10116.46,3883.46 10128.27,3883.46 10150,3861.73 C72.2@10150,3790 ; 10116.46,4596.57 D24.1-VDD@10116.46,4680.04 ; C24.2@10147.19,4589.39 C24.2@10150,4586.57
  Top Layer w40: C96.2@640,3660 C96.2@650,3660 723.54,3660 C95.2@1050,3660 1123.54,3660 C94.2@1450,3660 1523.54,3660 C93.2@1850,3660 1923.54,3660 C92.2@2240,3660 2323.54,3660 C91.2@2650,3660 2723.54,3660 C90.2@3050,3660 3130,3660 C89.2@3450,3660 3530,3660 C88.2@3850,3660 3923.54,3660 C87.2@4250,3660 4330,3660 4720,3660 C85.2@5050,3660 5123.54,3660 C84.2@5450,3660 5523.54,3660 C83.2@5850,3660 5930,3660 C82.2@6250,3660 6323.54,3660 C81.2@6650,3660 6723.54,3660 C80.2@7050,3660 7130,3660 C79.2@7450,3660 7530,3660 C78.2@7850,3660 7930,3660 C77.2@8250,3660 8323.54,3660 C76.2@8650,3660 8723.54,3660 C75.2@9050,3660 9123.54,3660 C74.2@9450,3660 9523.54,3660 C73.2@9840,3660 ; C288.2@650,456.85 723.54,456.85 873.68,456.85 874.5,457.68 958.41,457.68 959.24,456.85 C287.2@1050,456.85 ; C240.2@650,1256.85 723.54,1256.85 873.68,1256.85 874.5,1257.68 958.41,1257.68 959.24,1256.85 C239.2@1050,1256.85 ; C192.2@650,2066.85 723.94,2066.85 ; C144.2@650,2863.43 723.54,2863.43 C143.2@1050,2863.43 1123.54,2863.43 C142.2@1450,2863.43 1523.54,2863.43 C141.2@1850,2863.43 1923.54,2863.43 C140.2@2241.52,2863.43 2323.54,2863.43 C139.2@2650,2863.43 2723.54,2863.43 C138.2@3050,2863.43 3133.43,2863.43 C137.2@3450,2863.43 3533.43,2863.43 C136.2@3850,2863.43 3923.54,2863.43 C135.2@4250,2863.43 4333.43,2863.43 C134.2@4650,2863.43 4720,2863.43 C133.2@5050,2863.43 5123.54,2863.43 C132.2@5450,2863.43 5523.54,2863.43 C131.2@5850,2863.43 5933.43,2863.43 C130.2@6250,2863.43 6323.54,2863.43 C129.2@6650,2863.43 6723.54,2863.43 C128.2@7050,2863.43 7133.43,2863.43 C127.2@7450,2863.43 7533.43,2863.43 C126.2@7850,2863.43 7933.43,2863.43 C125.2@8250,2863.43 8323.54,2863.43 C124.2@8650,2863.43 8723.54,2863.43 C123.2@9050,2863.43 9123.54,2863.43 C122.2@9450,2863.43 9523.54,2863.43 C121.2@9850,2863.43 9903.46,2809.96 D121.1-VDD@9923.54,2809.96 ; C48.2@653.15,4470 720,4470 1130,4470 C46.2@1450,4470 1520,4470 C45.2@1850,4470 1930,4470 C44.2@2250,4470 2330,4470 C43.2@2650,4470 2730,4470 C42.2@3050,4470 3140,4470 C41.2@3450,4470 3540,4470 C40.2@3850,4470 3930,4470 C39.2@4250,4470 4340,4470 C38.2@4650,4470 4720,4470 C37.2@5050,4470 5130,4470 C36.2@5450,4470 5530,4470 C35.2@5850,4470 5940,4470 C34.2@6250,4470 6330,4470 C33.2@6650,4470 6730,4470 C32.2@7050,4470 7140,4470 C31.2@7450,4470 7540,4470 C30.2@7850,4470 7940,4470 C29.2@8250,4470 8330,4470 C28.2@8650,4470 8730,4470 C27.2@9050,4470 9120,4470 C26.2@9450,4470 9530,4470 C25.2@9850,4470 9910.04,4409.96 D25.1-VDD@9923.54,4409.96 ; 723.54,2066.46 723.94,2066.85 ; 820,4586.57 C1.2@950,4586.57 1320,4586.57 C2.2@1350,4586.57 C3.2@1750,4586.57 C4.2@2150,4586.57 C5.2@2550,4586.57 C6.2@2950,4586.57 C7.2@3350,4586.57 C8.2@3750,4586.57 C9.2@4150,4586.57 C10.2@4550,4586.57 C11.2@4950,4586.57 C12.2@5350,4586.57 C13.2@5750,4586.57 C14.2@6150,4586.57 C15.2@6550,4586.57 6920,4586.57 C16.2@6950,4586.57 7320,4586.57 C17.2@7350,4586.57 7720,4586.57 C18.2@7750,4586.57 8120,4586.57 C19.2@8150,4586.57 8520,4586.57 C20.2@8550,4586.57 8920,4586.57 C21.2@8950,4586.57 C22.2@9350,4586.57 C23.2@9750,4586.57 C24.2@10150,4586.57 ; 833.66,576.57 C241.2@950,576.57 C242.2@1350,576.57 C243.2@1750,576.57 C244.2@2150,576.57 C245.2@2550,576.57 C246.2@2950,576.57 C247.2@3350,576.57 C248.2@3750,576.57 C249.2@4150,576.57 C250.2@4550,576.57 C251.2@4950,576.57 C252.2@5350,576.57 C253.2@5750,576.57 C254.2@6150,576.57 C255.2@6550,576.57 C256.2@6950,576.57 C257.2@7350,576.57 C258.2@7750,576.57 C259.2@8150,576.57 C260.2@8550,576.57 C261.2@8950,576.57 C262.2@9350,576.57 C263.2@9750,576.57 C264.2@10150,576.57 ; 833.66,1376.57 C193.2@950,1376.57 C194.2@1350,1376.57 C195.2@1750,1376.57 C196.2@2150,1376.57 C197.2@2550,1376.57 C198.2@2950,1376.57 C199.2@3350,1376.57 C200.2@3750,1376.57 C201.2@4150,1376.57 C202.2@4550,1376.57 C203.2@4950,1376.57 C204.2@5350,1376.57 C205.2@5750,1376.57 C206.2@6150,1376.57 C207.2@6550,1376.57 C208.2@6950,1376.57 C209.2@7350,1376.57 C210.2@7750,1376.57 C211.2@8150,1376.57 C212.2@8550,1376.57 C213.2@8950,1376.57 C214.2@9350,1376.57 C215.2@9750,1376.57 C216.2@10150,1376.57 ; 833.66,2176.57 C145.2@950,2176.57 C146.2@1350,2176.57 C147.2@1750,2176.57 C148.2@2150,2176.57 C149.2@2550,2176.57 C150.2@2950,2176.57 C151.2@3350,2176.57 C152.2@3750,2176.57 C153.2@4150,2176.57 C154.2@4550,2176.57 C155.2@4950,2176.57 C156.2@5350,2176.57 C157.2@5750,2176.57 C158.2@6150,2176.57 C159.2@6550,2176.57 C160.2@6950,2176.57 C161.2@7350,2176.57 C162.2@7750,2176.57 C163.2@8150,2176.57 C164.2@8550,2176.57 C165.2@8950,2176.57 C166.2@9350,2176.57 C167.2@9750,2176.57 C168.2@10150,2176.57 ; 833.66,2976.57 C97.2@950,2976.57 C98.2@1350,2976.57 C99.2@1750,2976.57 C100.2@2150,2976.57 C101.2@2550,2976.57 C102.2@2950,2976.57 C103.2@3350,2976.57 C104.2@3750,2976.57 C105.2@4150,2976.57 C106.2@4550,2976.57 C107.2@4950,2976.57 C108.2@5350,2976.57 C109.2@5750,2976.57 C110.2@6150,2976.57 C111.2@6550,2976.57 C112.2@6950,2976.57 C113.2@7350,2976.57 C114.2@7750,2976.57 C115.2@8150,2976.57 C116.2@8550,2976.57 C117.2@8950,2976.57 C118.2@9350,2976.57 C119.2@9750,2976.57 C120.2@10150,2976.57 ; 840.12,3776.57 C49.2@950,3776.57 C50.2@1350,3776.57 C51.2@1750,3776.57 C52.2@2150,3776.57 C53.2@2550,3776.57 C54.2@2950,3776.57 C55.2@3350,3776.57 C56.2@3750,3776.57 C57.2@4150,3776.57 C58.2@4550,3776.57 C59.2@4950,3776.57 C60.2@5350,3776.57 C61.2@5750,3776.57 C62.2@6150,3776.57 C63.2@6550,3776.57 C64.2@6950,3776.57 C65.2@7350,3776.57 C66.2@7750,3776.57 C67.2@8150,3776.57 C68.2@8550,3776.57 C69.2@8950,3776.57 C70.2@9350,3776.57 C71.2@9750,3776.57 C72.2@10150,3776.57 ; C287.2@1050,457.68 1123.54,457.68 1450,457.68 1523.54,457.68 1923.54,457.68 2323.54,457.68 2723.54,457.68 3127.68,457.68 3527.68,457.68 3923.54,457.68 4327.68,457.68 4720,457.68 5123.54,457.68 5523.54,457.68 5927.68,457.68 6323.54,457.68 6723.54,457.68 7127.68,457.68 7527.68,457.68 7927.68,457.68 8323.54,457.68 8723.54,457.68 C267.2@9050,457.68 ; C239.2@1050,1257.68 1123.54,1257.68 1523.54,1257.68 1923.54,1257.68 2323.54,1257.68 2723.54,1257.68 3127.68,1257.68 3527.68,1257.68 3923.54,1257.68 4327.68,1257.68 4720,1257.68 5123.54,1257.68 5523.54,1257.68 5927.68,1257.68 6323.54,1257.68 6723.54,1257.68 7127.68,1257.68 7527.68,1257.68 7927.68,1257.68 8323.54,1257.68 8723.54,1257.68 9123.54,1257.68 9523.54,1257.68 9758.41,1257.68 9759.24,1256.85 C217.2@9850,1256.85 9896.89,1209.96 D217.1-VDD@9923.54,1209.96 ; C267.2@9050,456.85 9123.54,456.85 9273.68,456.85 9274.5,457.68 9359.14,457.68 9359.93,456.88 C266.2@9444.57,456.88 ; C266.2@9450,456.88 9523.54,456.88 9558.41,456.88 9559.2,457.68 9758.41,457.68 9759.24,456.85 C265.2@9850,456.85 9896.89,409.96 D265.1-VDD@9923.54,409.96 ; C73.2@9850,3660 9900.04,3609.96 D73.1-VDD@9923.54,3609.96 ; D169.1-VDD@9923.54,2009.96 9906.89,2009.96 C169.2@9850,2066.85 C170.2@9450,2066.85 C171.2@9050,2066.85 C172.2@8650,2066.85 C173.2@8250,2066.85 7936.85,2066.85 C174.2@7850,2066.85 7536.85,2066.85 C175.2@7450,2066.85 7136.85,2066.85 C176.2@7050,2066.85 C177.2@6650,2066.85 C178.2@6250,2066.85 5936.85,2066.85 C179.2@5850,2066.85 C180.2@5450,2066.85 C181.2@5050,2066.85 4720,2066.85 4336.85,2066.85 C183.2@4250,2066.85 C184.2@3850,2066.85 3536.85,2066.85 C185.2@3450,2066.85 3136.85,2066.85 C186.2@3050,2066.85 C187.2@2650,2066.85 C188.2@2240,2066.85 C189.2@1850,2066.85 C190.2@1450,2066.85 C191.2@1050,2066.85 723.94,2066.85
GND: C1.1 C2.1 C3.1 C4.1 C5.1 C6.1 C7.1 C8.1 C9.1 C10.1 C11.1 C12.1 C13.1 C14.1 C15.1 C16.1 C17.1 C18.1 C19.1 C20.1 C21.1 C22.1 C23.1 C24.1 C25.1 C26.1 C27.1 C28.1 C29.1 C30.1 C31.1 C32.1 C33.1 C34.1 C35.1 C36.1 C37.1 C38.1 C39.1 C40.1 C41.1 C42.1 C43.1 C44.1 C45.1 C46.1 C47.1 C48.1 C49.1 C50.1 C51.1 C52.1 C53.1 C54.1 C55.1 C56.1 C57.1 C58.1 C59.1 C60.1 C61.1 C62.1 C63.1 C64.1 C65.1 C66.1 C67.1 C68.1 C69.1 C70.1 C71.1 C72.1 C73.1 C74.1 C75.1 C76.1 C77.1 C78.1 C79.1 C80.1 C81.1 C82.1 C83.1 C84.1 C85.1 C86.1 C87.1 C88.1 C89.1 C90.1 C91.1 C92.1 C93.1 C94.1 C95.1 C96.1 C97.1 C98.1 C99.1 C100.1 C101.1 C102.1 C103.1 C104.1 C105.1 C106.1 C107.1 C108.1 C109.1 C110.1 C111.1 C112.1 C113.1 C114.1 C115.1 C116.1 C117.1 C118.1 C119.1 C120.1 C121.1 C122.1 C123.1 C124.1 C125.1 C126.1 C127.1 C128.1 C129.1 C130.1 C131.1 C132.1 C133.1 C134.1 C135.1 C136.1 C137.1 C138.1 C139.1 C140.1 C141.1 C142.1 C143.1 C144.1 C145.1 C146.1 C147.1 C148.1 C149.1 C150.1 C151.1 C152.1 C153.1 C154.1 C155.1 C156.1 C157.1 C158.1 C159.1 C160.1 C161.1 C162.1 C163.1 C164.1 C165.1 C166.1 C167.1 C168.1 C169.1 C170.1 C171.1 C172.1 C173.1 C174.1 C175.1 C176.1 C177.1 C178.1 C179.1 C180.1 C181.1 C182.1 C183.1 C184.1 C185.1 C186.1 C187.1 C188.1 C189.1 C190.1 C191.1 C192.1 C193.1 C194.1 C195.1 C196.1 C197.1 C198.1 C199.1 C200.1 C201.1 C202.1 C203.1 C204.1 C205.1 C206.1 C207.1 C208.1 C209.1 C210.1 C211.1 C212.1 C213.1 C214.1 C215.1 C216.1 C217.1 C218.1 C219.1 C220.1 C221.1 C222.1 C223.1 C224.1 C225.1 C226.1 C227.1 C228.1 C229.1 C230.1 C231.1 C232.1 C233.1 C234.1 C235.1 C236.1 C237.1 C238.1 C239.1 C240.1 C241.1 C242.1 C243.1 C244.1 C245.1 C246.1 C247.1 C248.1 C249.1 C250.1 C251.1 C252.1 C253.1 C254.1 C255.1 C256.1 C257.1 C258.1 C259.1 C260.1 C261.1 C262.1 C263.1 C264.1 C265.1 C266.1 C267.1 C268.1 C269.1 C270.1 C271.1 C272.1 C273.1 C274.1 C275.1 C276.1 C277.1 C278.1 C279.1 C280.1 C281.1 C282.1 C283.1 C284.1 C285.1 C286.1 C287.1 C288.1 D1.3-GND D2.3-GND D3.3-GND D4.3-GND D5.3-GND D6.3-GND D7.3-GND D8.3-GND D9.3-GND D10.3-GND D11.3-GND D12.3-GND D13.3-GND D14.3-GND D15.3-GND D16.3-GND D17.3-GND D18.3-GND D19.3-GND D20.3-GND D21.3-GND D22.3-GND D23.3-GND D24.3-GND D25.3-GND D26.3-GND D27.3-GND D28.3-GND D29.3-GND D30.3-GND D31.3-GND D32.3-GND D33.3-GND D34.3-GND D35.3-GND D36.3-GND D37.3-GND D38.3-GND D39.3-GND D40.3-GND D41.3-GND D42.3-GND D43.3-GND D44.3-GND D45.3-GND D46.3-GND D47.3-GND D48.3-GND D49.3-GND D50.3-GND D51.3-GND D52.3-GND D53.3-GND D54.3-GND D55.3-GND D56.3-GND D57.3-GND D58.3-GND D59.3-GND D60.3-GND D61.3-GND D62.3-GND D63.3-GND D64.3-GND D65.3-GND D66.3-GND D67.3-GND D68.3-GND D69.3-GND D70.3-GND D71.3-GND D72.3-GND D73.3-GND D74.3-GND D75.3-GND D76.3-GND D77.3-GND D78.3-GND D79.3-GND D80.3-GND D81.3-GND D82.3-GND D83.3-GND D84.3-GND D85.3-GND D86.3-GND D87.3-GND D88.3-GND D89.3-GND D90.3-GND D91.3-GND D92.3-GND D93.3-GND D94.3-GND D95.3-GND D96.3-GND D97.3-GND D98.3-GND D99.3-GND D100.3-GND D101.3-GND D102.3-GND D103.3-GND D104.3-GND D105.3-GND D106.3-GND D107.3-GND D108.3-GND D109.3-GND D110.3-GND D111.3-GND D112.3-GND D113.3-GND D114.3-GND D115.3-GND D116.3-GND D117.3-GND D118.3-GND D119.3-GND D120.3-GND D121.3-GND D122.3-GND D123.3-GND D124.3-GND D125.3-GND D126.3-GND D127.3-GND D128.3-GND D129.3-GND D130.3-GND D131.3-GND D132.3-GND D133.3-GND D134.3-GND D135.3-GND D136.3-GND D137.3-GND D138.3-GND D139.3-GND D140.3-GND D141.3-GND D142.3-GND D143.3-GND D144.3-GND D145.3-GND D146.3-GND D147.3-GND D148.3-GND D149.3-GND D150.3-GND D151.3-GND D152.3-GND D153.3-GND D154.3-GND D155.3-GND D156.3-GND D157.3-GND D158.3-GND D159.3-GND D160.3-GND D161.3-GND D162.3-GND D163.3-GND D164.3-GND D165.3-GND D166.3-GND D167.3-GND D168.3-GND D169.3-GND D170.3-GND D171.3-GND D172.3-GND D173.3-GND D174.3-GND D175.3-GND D176.3-GND D177.3-GND D178.3-GND D179.3-GND D180.3-GND D181.3-GND D182.3-GND D183.3-GND D184.3-GND D185.3-GND D186.3-GND D187.3-GND D188.3-GND D189.3-GND D190.3-GND D191.3-GND D192.3-GND D193.3-GND D194.3-GND D195.3-GND D196.3-GND D197.3-GND D198.3-GND D199.3-GND D200.3-GND D201.3-GND D202.3-GND D203.3-GND D204.3-GND D205.3-GND D206.3-GND D207.3-GND D208.3-GND D209.3-GND D210.3-GND D211.3-GND D212.3-GND D213.3-GND D214.3-GND D215.3-GND D216.3-GND D217.3-GND D218.3-GND D219.3-GND D220.3-GND D221.3-GND D222.3-GND D223.3-GND D224.3-GND D225.3-GND D226.3-GND D227.3-GND D228.3-GND D229.3-GND D230.3-GND D231.3-GND D232.3-GND D233.3-GND D234.3-GND D235.3-GND D236.3-GND D237.3-GND D238.3-GND D239.3-GND D240.3-GND D241.3-GND D242.3-GND D243.3-GND D244.3-GND D245.3-GND D246.3-GND D247.3-GND D248.3-GND D249.3-GND D250.3-GND D251.3-GND D252.3-GND D253.3-GND D254.3-GND D255.3-GND D256.3-GND D257.3-GND D258.3-GND D259.3-GND D260.3-GND D261.3-GND D262.3-GND D263.3-GND D264.3-GND D265.3-GND D266.3-GND D267.3-GND D268.3-GND D269.3-GND D270.3-GND D271.3-GND D272.3-GND D273.3-GND D274.3-GND D275.3-GND D276.3-GND D277.3-GND D278.3-GND D279.3-GND D280.3-GND D281.3-GND D282.3-GND D283.3-GND D284.3-GND D285.3-GND D286.3-GND D287.3-GND D288.3-GND J2.2 J3.A1 J3.A12 J3.B1 J3.B12 J3.S pad.7 R18.2 R19.2
NetD1_2-DOUT: D1.2-DOUT D2.4-DIN | length 267.8
  Top Layer w25: D1.2-DOUT@916.46,4809.96 993.62,4809.96 1106.52,4697.07 1106.52,4685.26 1111.73,4680.04 D2.4-DIN@1123.54,4680.04
NetD1_4-DIN: D1.4-DIN R1.2 | length 111
  Top Layer w20: R1.2@625,4650 681.69,4650 711.73,4680.04 D1.4-DIN@723.54,4680.04
NetD2_2-DOUT: D2.2-DOUT D3.4-DIN | length 267.8
  Top Layer w25: D2.2-DOUT@1316.46,4809.96 1393.62,4809.96 1506.52,4697.07 1506.52,4685.26 1511.73,4680.04 D3.4-DIN@1523.54,4680.04
NetD3_2-DOUT: D3.2-DOUT D4.4-DIN | length 267.8
  Top Layer w25: D3.2-DOUT@1716.46,4809.96 1793.62,4809.96 1906.52,4697.07 1906.52,4685.26 1911.73,4680.04 D4.4-DIN@1923.54,4680.04
NetD4_2-DOUT: D4.2-DOUT D5.4-DIN | length 267.8
  Top Layer w25: D4.2-DOUT@2116.46,4809.96 2193.62,4809.96 2306.52,4697.07 2306.52,4685.26 2311.73,4680.04 D5.4-DIN@2323.54,4680.04
NetD5_2-DOUT: D5.2-DOUT D6.4-DIN | length 267.8
  Top Layer w25: D5.2-DOUT@2516.46,4809.96 2593.62,4809.96 2706.52,4697.07 2706.52,4685.26 2711.73,4680.04 D6.4-DIN@2723.54,4680.04
NetD6_2-DOUT: D6.2-DOUT D7.4-DIN | length 267.8
  Top Layer w25: D6.2-DOUT@2916.46,4809.96 2993.62,4809.96 3106.52,4697.07 3106.52,4685.26 3111.73,4680.04 D7.4-DIN@3123.54,4680.04
NetD7_2-DOUT: D7.2-DOUT D8.4-DIN | length 267.8
  Top Layer w25: D7.2-DOUT@3316.46,4809.96 3393.62,4809.96 3506.52,4697.07 3506.52,4685.26 3511.73,4680.04 D8.4-DIN@3523.54,4680.04
NetD8_2-DOUT: D8.2-DOUT D9.4-DIN | length 267.8
  Top Layer w25: D8.2-DOUT@3716.46,4809.96 3793.62,4809.96 3906.52,4697.07 3906.52,4685.26 3911.73,4680.04 D9.4-DIN@3923.54,4680.04
NetD9_2-DOUT: D9.2-DOUT D10.4-DIN | length 267.8
  Top Layer w25: D9.2-DOUT@4116.46,4809.96 4193.62,4809.96 4306.52,4697.07 4306.52,4685.26 4311.73,4680.04 D10.4-DIN@4323.54,4680.04
NetD10_2-DOUT: D10.2-DOUT D11.4-DIN | length 267.8
  Top Layer w25: D10.2-DOUT@4516.46,4809.96 4593.62,4809.96 4706.52,4697.07 4706.52,4685.26 4711.73,4680.04 D11.4-DIN@4723.54,4680.04
NetD11_2-DOUT: D11.2-DOUT D12.4-DIN | length 267.8
  Top Layer w25: D11.2-DOUT@4916.46,4809.96 4993.62,4809.96 5106.52,4697.07 5106.52,4685.26 5111.73,4680.04 D12.4-DIN@5123.54,4680.04
NetD12_2-DOUT: D12.2-DOUT D13.4-DIN | length 267.8
  Top Layer w25: D12.2-DOUT@5316.46,4809.96 5393.62,4809.96 5506.52,4697.07 5506.52,4685.26 5511.73,4680.04 D13.4-DIN@5523.54,4680.04
NetD13_2-DOUT: D13.2-DOUT D14.4-DIN | length 267.8
  Top Layer w25: D13.2-DOUT@5716.46,4809.96 5793.62,4809.96 5906.52,4697.07 5906.52,4685.26 5911.73,4680.04 D14.4-DIN@5923.54,4680.04
NetD14_2-DOUT: D14.2-DOUT D15.4-DIN | length 267.8
  Top Layer w25: D14.2-DOUT@6116.46,4809.96 6193.62,4809.96 6306.52,4697.07 6306.52,4685.26 6311.73,4680.04 D15.4-DIN@6323.54,4680.04
NetD15_2-DOUT: D15.2-DOUT D16.4-DIN | length 267.8
  Top Layer w25: D15.2-DOUT@6516.46,4809.96 6593.62,4809.96 6706.52,4697.07 6706.52,4685.26 6711.73,4680.04 D16.4-DIN@6723.54,4680.04
NetD16_2-DOUT: D16.2-DOUT D17.4-DIN | length 267.8
  Top Layer w25: D16.2-DOUT@6916.46,4809.96 6993.62,4809.96 7106.52,4697.07 7106.52,4685.26 7111.73,4680.04 D17.4-DIN@7123.54,4680.04
NetD17_2-DOUT: D17.2-DOUT D18.4-DIN | length 267.8
  Top Layer w25: D17.2-DOUT@7316.46,4809.96 7393.62,4809.96 7506.52,4697.07 7506.52,4685.26 7511.73,4680.04 D18.4-DIN@7523.54,4680.04
NetD18_2-DOUT: D18.2-DOUT D19.4-DIN | length 267.8
  Top Layer w25: D18.2-DOUT@7716.46,4809.96 7793.62,4809.96 7906.52,4697.07 7906.52,4685.26 7911.73,4680.04 D19.4-DIN@7923.54,4680.04
NetD19_2-DOUT: D19.2-DOUT D20.4-DIN | length 267.8
  Top Layer w25: D19.2-DOUT@8116.46,4809.96 8193.62,4809.96 8306.52,4697.07 8306.52,4685.26 8311.73,4680.04 D20.4-DIN@8323.54,4680.04
NetD20_2-DOUT: D20.2-DOUT D21.4-DIN | length 267.8
  Top Layer w25: D20.2-DOUT@8516.46,4809.96 8593.62,4809.96 8706.52,4697.07 8706.52,4685.26 8711.73,4680.04 D21.4-DIN@8723.54,4680.04
NetD21_2-DOUT: D21.2-DOUT D22.4-DIN | length 267.8
  Top Layer w25: D21.2-DOUT@8916.46,4809.96 8993.62,4809.96 9106.52,4697.07 9106.52,4685.26 9111.73,4680.04 D22.4-DIN@9123.54,4680.04
NetD22_2-DOUT: D22.2-DOUT D23.4-DIN | length 267.8
  Top Layer w25: D22.2-DOUT@9316.46,4809.96 9393.62,4809.96 9506.52,4697.07 9506.52,4685.26 9511.73,4680.04 D23.4-DIN@9523.54,4680.04
NetD23_2-DOUT: D23.2-DOUT D24.4-DIN | length 267.8
  Top Layer w25: D23.2-DOUT@9716.46,4809.96 9793.62,4809.96 9906.52,4697.07 9906.52,4685.26 9911.73,4680.04 D24.4-DIN@9923.54,4680.04
NetD24_2-DOUT: D24.2-DOUT R2.2 | length 388.1
  Top Layer w25: D24.2-DOUT@10116.46,4809.96 10128.27,4809.96 10340,4598.23 R2.2@10340,4521.36
NetD25_2-DOUT: D25.2-DOUT D26.4-DIN | length 267.8
  Top Layer w25: D26.4-DIN@9716.46,4409.96 9728.27,4409.96 9733.48,4404.74 9733.48,4392.93 9846.38,4280.04 D25.2-DOUT@9923.54,4280.04
NetD25_4-DIN: D25.4-DIN R2.1 | length 251.4
  Top Layer w25: D25.4-DIN@10116.46,4409.96 10275.55,4409.96 10333.8,4468.21 10333.8,4470.18 10338.03,4474.41 R2.1@10340,4474.41
NetD26_2-DOUT: D26.2-DOUT D27.4-DIN | length 267.8
  Top Layer w25: D27.4-DIN@9316.46,4409.96 9328.27,4409.96 9333.48,4404.74 9333.48,4392.93 9446.38,4280.04 D26.2-DOUT@9523.54,4280.04
NetD27_2-DOUT: D27.2-DOUT D28.4-DIN | length 267.8
  Top Layer w25: D28.4-DIN@8916.46,4409.96 8928.27,4409.96 8933.48,4404.74 8933.48,4392.93 9046.38,4280.04 D27.2-DOUT@9123.54,4280.04
NetD28_2-DOUT: D28.2-DOUT D29.4-DIN | length 267.8
  Top Layer w25: D29.4-DIN@8516.46,4409.96 8528.27,4409.96 8533.48,4404.74 8533.48,4392.93 8646.38,4280.04 D28.2-DOUT@8723.54,4280.04
NetD29_2-DOUT: D29.2-DOUT D30.4-DIN | length 267.8
  Top Layer w25: D30.4-DIN@8116.46,4409.96 8128.27,4409.96 8133.48,4404.74 8133.48,4392.93 8246.38,4280.04 D29.2-DOUT@8323.54,4280.04
NetD30_2-DOUT: D30.2-DOUT D31.4-DIN | length 267.8
  Top Layer w25: D31.4-DIN@7716.46,4409.96 7728.27,4409.96 7733.48,4404.74 7733.48,4392.93 7846.38,4280.04 D30.2-DOUT@7923.54,4280.04
NetD31_2-DOUT: D31.2-DOUT D32.4-DIN | length 267.8
  Top Layer w25: D32.4-DIN@7316.46,4409.96 7328.27,4409.96 7333.48,4404.74 7333.48,4392.93 7446.38,4280.04 D31.2-DOUT@7523.54,4280.04
NetD32_2-DOUT: D32.2-DOUT D33.4-DIN | length 267.8
  Top Layer w25: D33.4-DIN@6916.46,4409.96 6928.27,4409.96 6933.48,4404.74 6933.48,4392.93 7046.38,4280.04 D32.2-DOUT@7123.54,4280.04
NetD33_2-DOUT: D33.2-DOUT D34.4-DIN | length 267.8
  Top Layer w25: D34.4-DIN@6516.46,4409.96 6528.27,4409.96 6533.48,4404.74 6533.48,4392.93 6646.38,4280.04 D33.2-DOUT@6723.54,4280.04
NetD34_2-DOUT: D34.2-DOUT D35.4-DIN | length 267.8
  Top Layer w25: D35.4-DIN@6116.46,4409.96 6128.27,4409.96 6133.48,4404.74 6133.48,4392.93 6246.38,4280.04 D34.2-DOUT@6323.54,4280.04
NetD35_2-DOUT: D35.2-DOUT D36.4-DIN | length 267.8
  Top Layer w25: D36.4-DIN@5716.46,4409.96 5728.27,4409.96 5733.48,4404.74 5733.48,4392.93 5846.38,4280.04 D35.2-DOUT@5923.54,4280.04
NetD36_2-DOUT: D36.2-DOUT D37.4-DIN | length 267.8
  Top Layer w25: D37.4-DIN@5316.46,4409.96 5328.27,4409.96 5333.48,4404.74 5333.48,4392.93 5446.38,4280.04 D36.2-DOUT@5523.54,4280.04
NetD37_2-DOUT: D37.2-DOUT D38.4-DIN | length 267.8
  Top Layer w25: D38.4-DIN@4916.46,4409.96 4928.27,4409.96 4933.48,4404.74 4933.48,4392.93 5046.38,4280.04 D37.2-DOUT@5123.54,4280.04
NetD38_2-DOUT: D38.2-DOUT D39.4-DIN | length 267.8
  Top Layer w25: D39.4-DIN@4516.46,4409.96 4528.27,4409.96 4533.48,4404.74 4533.48,4392.93 4646.38,4280.04 D38.2-DOUT@4723.54,4280.04
NetD39_2-DOUT: D39.2-DOUT D40.4-DIN | length 267.8
  Top Layer w25: D40.4-DIN@4116.46,4409.96 4128.27,4409.96 4133.48,4404.74 4133.48,4392.93 4246.38,4280.04 D39.2-DOUT@4323.54,4280.04
NetD40_2-DOUT: D40.2-DOUT D41.4-DIN | length 267.8
  Top Layer w25: D41.4-DIN@3716.46,4409.96 3728.27,4409.96 3733.48,4404.74 3733.48,4392.93 3846.38,4280.04 D40.2-DOUT@3923.54,4280.04
NetD41_2-DOUT: D41.2-DOUT D42.4-DIN | length 267.8
  Top Layer w25: D42.4-DIN@3316.46,4409.96 3328.27,4409.96 3333.48,4404.74 3333.48,4392.93 3446.38,4280.04 D41.2-DOUT@3523.54,4280.04
NetD42_2-DOUT: D42.2-DOUT D43.4-DIN | length 267.8
  Top Layer w25: D43.4-DIN@2916.46,4409.96 2928.27,4409.96 2933.48,4404.74 2933.48,4392.93 3046.38,4280.04 D42.2-DOUT@3123.54,4280.04
NetD43_2-DOUT: D43.2-DOUT D44.4-DIN | length 267.8
  Top Layer w25: D44.4-DIN@2516.46,4409.96 2528.27,4409.96 2533.48,4404.74 2533.48,4392.93 2646.38,4280.04 D43.2-DOUT@2723.54,4280.04
NetD44_2-DOUT: D44.2-DOUT D45.4-DIN | length 267.8
  Top Layer w25: D45.4-DIN@2116.46,4409.96 2128.27,4409.96 2133.48,4404.74 2133.48,4392.93 2246.38,4280.04 D44.2-DOUT@2323.54,4280.04
NetD45_2-DOUT: D45.2-DOUT D46.4-DIN | length 267.8
  Top Layer w25: D46.4-DIN@1716.46,4409.96 1728.27,4409.96 1733.48,4404.74 1733.48,4392.93 1846.38,4280.04 D45.2-DOUT@1923.54,4280.04
NetD46_2-DOUT: D46.2-DOUT D47.4-DIN | length 267.8
  Top Layer w25: D47.4-DIN@1316.46,4409.96 1328.27,4409.96 1333.48,4404.74 1333.48,4392.93 1446.38,4280.04 D46.2-DOUT@1523.54,4280.04
NetD47_2-DOUT: D47.2-DOUT D48.4-DIN | length 267.8
  Top Layer w25: D48.4-DIN@916.46,4409.96 928.27,4409.96 933.48,4404.74 933.48,4392.93 1046.38,4280.04 D47.2-DOUT@1123.54,4280.04
NetD49_2-DOUT: D49.2-DOUT D50.4-DIN | length 267.8
  Top Layer w25: D49.2-DOUT@916.46,4009.96 993.62,4009.96 1106.52,3897.07 1106.52,3885.26 1111.73,3880.04 D50.4-DIN@1123.54,3880.04
NetD49_4-DIN: D49.4-DIN R3.1 R4.2 | length 175.3
  Top Layer w20: R3.1@625,3950 625,3875.59 R4.2@625.59,3875 630.63,3880.04 D49.4-DIN@723.54,3880.04
NetD50_2-DOUT: D50.2-DOUT D51.4-DIN | length 267.8
  Top Layer w25: D50.2-DOUT@1316.46,4009.96 1393.62,4009.96 1506.52,3897.07 1506.52,3885.26 1511.73,3880.04 D51.4-DIN@1523.54,3880.04
NetD51_2-DOUT: D51.2-DOUT D52.4-DIN | length 267.8
  Top Layer w25: D51.2-DOUT@1716.46,4009.96 1793.62,4009.96 1906.52,3897.07 1906.52,3885.26 1911.73,3880.04 D52.4-DIN@1923.54,3880.04
NetD52_2-DOUT: D52.2-DOUT D53.4-DIN | length 267.8
  Top Layer w25: D52.2-DOUT@2116.46,4009.96 2193.62,4009.96 2306.52,3897.07 2306.52,3885.26 2311.73,3880.04 D53.4-DIN@2323.54,3880.04
NetD53_2-DOUT: D53.2-DOUT D54.4-DIN | length 267.8
  Top Layer w25: D53.2-DOUT@2516.46,4009.96 2593.62,4009.96 2706.52,3897.07 2706.52,3885.26 2711.73,3880.04 D54.4-DIN@2723.54,3880.04
NetD54_2-DOUT: D54.2-DOUT D55.4-DIN | length 267.8
  Top Layer w25: D54.2-DOUT@2916.46,4009.96 2993.62,4009.96 3106.52,3897.07 3106.52,3885.26 3111.73,3880.04 D55.4-DIN@3123.54,3880.04
NetD55_2-DOUT: D55.2-DOUT D56.4-DIN | length 267.8
  Top Layer w25: D55.2-DOUT@3316.46,4009.96 3393.62,4009.96 3506.52,3897.07 3506.52,3885.26 3511.73,3880.04 D56.4-DIN@3523.54,3880.04
NetD56_2-DOUT: D56.2-DOUT D57.4-DIN | length 267.8
  Top Layer w25: D56.2-DOUT@3716.46,4009.96 3793.62,4009.96 3906.52,3897.07 3906.52,3885.26 3911.73,3880.04 D57.4-DIN@3923.54,3880.04
NetD57_2-DOUT: D57.2-DOUT D58.4-DIN | length 267.8
  Top Layer w25: D57.2-DOUT@4116.46,4009.96 4193.62,4009.96 4306.52,3897.07 4306.52,3885.26 4311.73,3880.04 D58.4-DIN@4323.54,3880.04